# Altium PCB PCB1.PcbDoc
Units mil, origin at the board's own origin, x right, y up, seen from the top; angles counter-clockwise.
Board outline 3937.01 x 5905.51 mil, 2 copper layers (Top Layer, Bottom Layer); 149 components, 103 nets, 457 pads, 0 vias.
Unrouted connection lines stored in the file: 331.
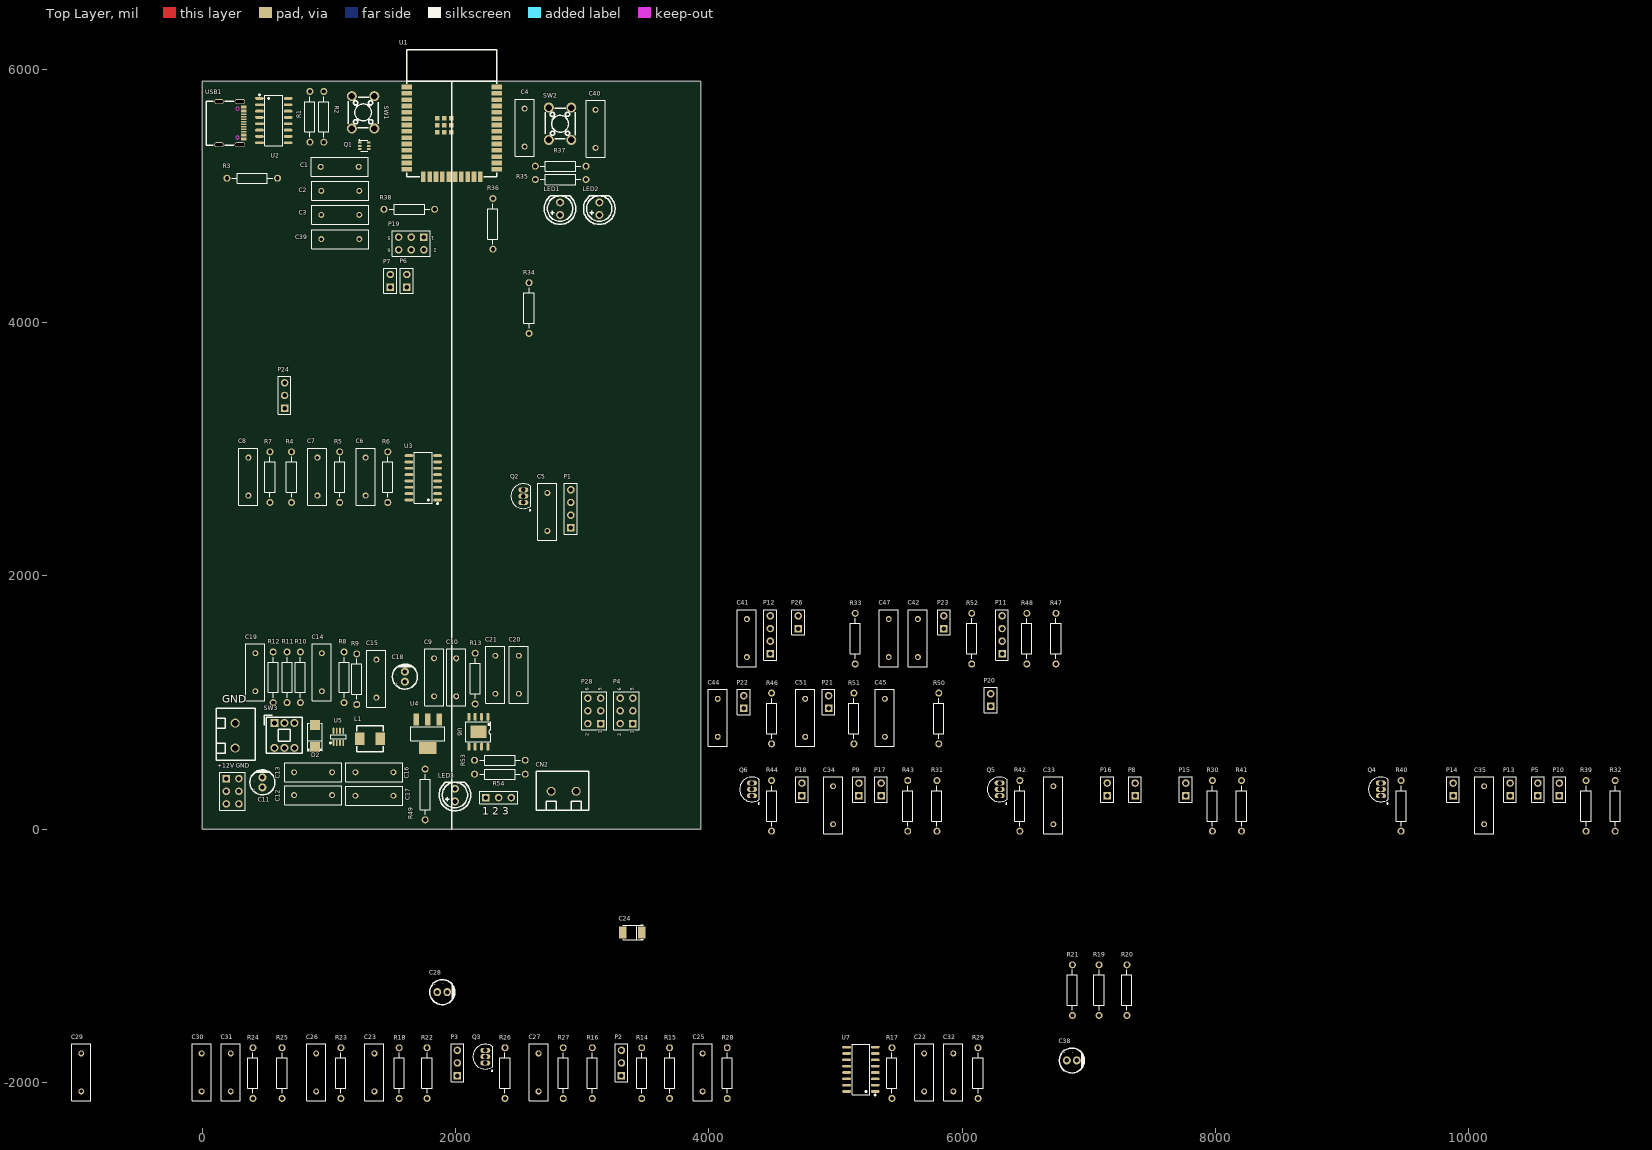
[diagram p0: Top Layer view]
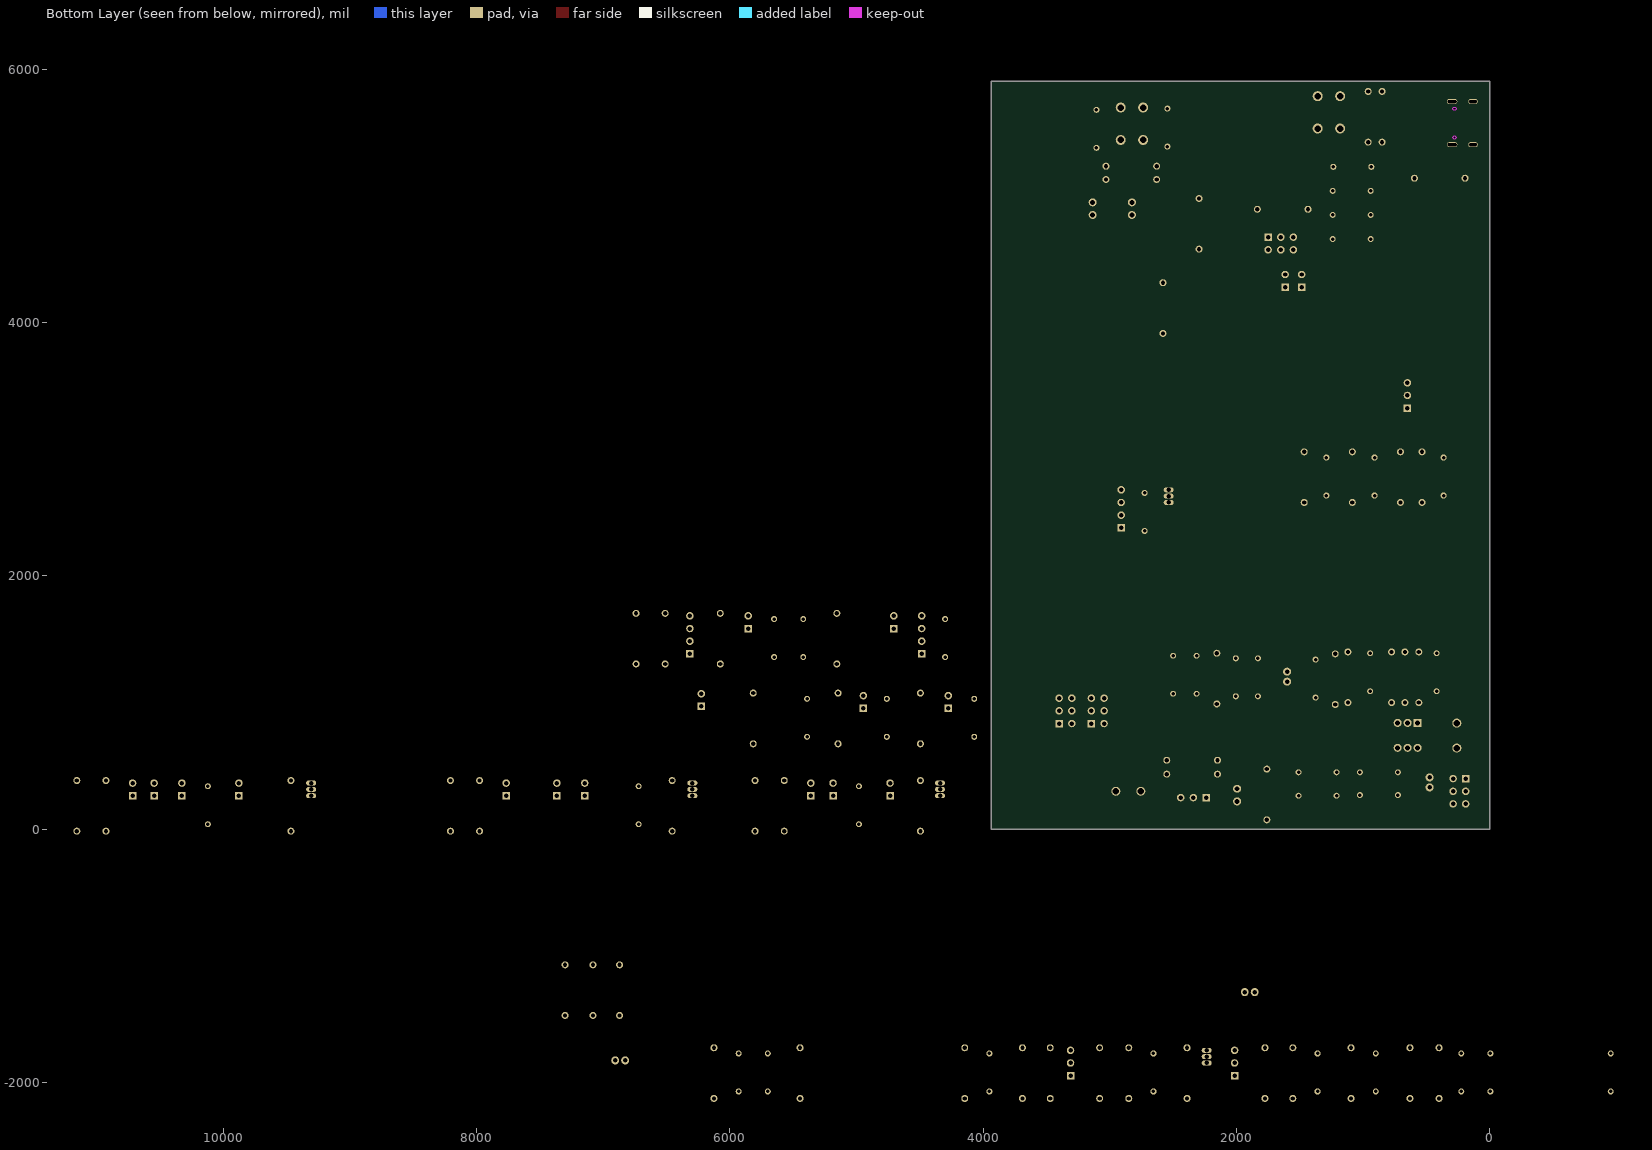
[diagram p1: Bottom Layer view, seen from below]

## Layer stack, top to bottom
Top Solder: solder mask 0.4, Solder Resist, Dk 3.5
Top Layer: signal copper 1.4
Dielectric 1: dielectric 12.6, FR-4, Dk 4.8
Bottom Layer: signal copper 1.4
Bottom Solder: solder mask 0.4, Solder Resist, Dk 3.5

## Board outline
0,0 3937.01,0 3937.01,5905.51 0,5905.51

## Design rules (kind name [scope] priority, off if disabled: settings)
Clearance Clearance_1 [All] p1: gap=10 ignorepadtopadclearanceinfootprint=FALSE except(0: Arc-Hole Track-Hole SMDPad-Hole THPad-Hole Via-Hole Fill-Hole Poly-Hole Region-Hole Text-Hole)
Clearance [All] p2: gap=10 ignorepadtopadclearanceinfootprint=FALSE except(0: Arc-Hole Track-Hole SMDPad-Hole THPad-Hole Via-Hole Fill-Hole Poly-Hole Region-Hole Text-Hole)
PolygonConnect [All] p1: connectstyle=Relief reliefconductorwidth=10 reliefentries=4 polygonreliefangle="90 Angle" airgapwidth=10
RoomDefinition Sensor [InComponentClass('Sensor')] p1 off: confinementstyle=ConfineIn formatcopy=TRUE lockcomponents=FALSE outline -1040,-2305 9890,-2305 9890,-1585 -1040,-1585
RoomDefinition IO [InComponentClass('IO')] p2 off: confinementstyle=ConfineIn formatcopy=TRUE lockcomponents=FALSE outline 4230,-55 11300,-55 11300,525 4230,525
RoutingVias [All] p1: holewidth=28 width=50 viastyle="Through Hole" minholewidth=28 minwidth=50 maxholewidth=28 maxwidth=50
SolderMaskExpansion [All] p1: expansion=4 istentingtop=FALSE
Width [All] p1: maxlimit=10 minlimit=10 preferedwidth=10
30 further rules are at their usual default settings.

## Classes and differential pairs
component class IO2: C41 C42 C47 P11 P12 P23 P26 R33 R34 R47 R48 R52
component class Sensor: C5 C6 C7 C8 C22 C23 C24 C25 C26 C27 C28 C29 C30 C31 C32 C38 P1 P2 P3 P24 Q2 Q3 R4 R5 R6 R7 R14 R15 R16 R17 R18 R19 R20 R21 R22 R23 R24 R25 R26 R27 R28 R29 U3 U7
component class Power: +12V C9 C10 C11 C12 C13 C14 C15 C16 C17 C18 C19 C20 C21 CN2 D2 GND L1 LED2 LED3 P4 P28 R8 R9 R10 R11 R12 R13 R36 R49 R53 R54 SW3 U4 U5 U6
component class IO: C33 C34 C35 C44 C45 C51 P5 P6 P7 P8 P9 P10 P13 P14 P15 P16 P17 P18 P20 P21 P22 Q4 Q5 Q6 R30 R31 R32 R39 R40 R41 R42 R43 R44 R46 R50 R51
component class Core: C1 C2 C3 C4 C39 C40 C? LED1 P19 Q1 R1 R2 R3 R35 R37 R38 SW1 SW2 U1 U2 USB1

## Components (designator, comment, footprint, x,y, rotation, side; value= is the part's Value field where it differs from the comment)
"1 2 3" "TestCurrent" HDR1X3 2240,250 r0 top (schematic designator P25)
+12V "MX126-5.0-02P-GN01-Cu-S-A" CONN-TH_2P-P5.00_MX126-5.0-GN01-02P-CU-S-A 260,740 r270 top (schematic designator CN1)
C1 "Cap" RAD-0.3 1085,5230 r0 top value=100nF
C2 "Cap" RAD-0.3 1090,5040 r0 top value=10uF
C3 "Cap" RAD-0.3 1090,4850 r0 top value=100nF
C4 "Cap" RAD-0.3 2545,5540 r270 top value=100nF
C5 "Cap" RAD-0.3 2725,2505 r90 top value=10uF
C6 "Cap" RAD-0.3 1290,2785 r90 top value=10uF
C7 "Cap" RAD-0.3 910,2785 r90 top value=100nF
C8 "Cap" RAD-0.3 365,2785 r90 top value=100nF
C9 "Cap" RAD-0.3 1830,1200 r270 top value=10uF
C10 "Cap" RAD-0.3 2005,1200 r270 top value=100uF
C11 "47uF" CAP-TH_BD5.0-P2.00-D0.5-FD-A 475,370 r90 top
C12 "Cap" RAD-0.3 875,270 r180 top value=22uF
C13 "Cap" RAD-0.3 875,450 r180 top value=100nF
C14 "Cap" RAD-0.3 945,1240 r270 top value=100nF
C15 "Cap" RAD-0.3 1375,1190 r90 top value=100uF
C16 "Cap" RAD-0.3 1360,450 r0 top value=22uF
C17 "Cap" RAD-0.3 1360,265 r0 top value=22uF
C18 "47uF" CAP-TH_BD5.0-P2.00-D0.5-FD-A 1600,1205 r90 top
C19 "Cap" RAD-0.3 420,1240 r270 top value=33pF
C20 "Cap" RAD-0.3 2500,1220 r90 top value=100nF
C21 "Cap" RAD-0.3 2315,1220 r90 top value=47uF
C22 "Cap" RAD-0.3 5700,-1920 r90 top value=10nF
C23 "Cap" RAD-0.3 1360,-1920 r90 top value=5nF
C24 "22uF" CASE-B_3528 3395,-815 r180 top
C25 "Cap" RAD-0.3 3950,-1920 r90 top value=100nF
C26 "Cap" RAD-0.3 900,-1920 r90 top value=10nF
C27 "Cap" RAD-0.3 2655,-1920 r90 top value=10nF
C28 "47uF" CAP-TH_BD5.0-P2.00-D0.5-FD-A 1895,-1285 r0 top
C29 "Cap" RAD-0.3 -955,-1920 r90 top value=10nF
C30 "Cap" RAD-0.3 -5,-1920 r90 top value=10nF
C31 "Cap" RAD-0.3 225,-1920 r90 top value=100nF
C32 "Cap" RAD-0.3 5930,-1920 r90 top value=10nF
C33 "Cap" RAD-0.3 6720,190 r90 top value=100nF
C34 "Cap" RAD-0.3 4980,190 r90 top value=100nF
C35 "Cap" RAD-0.3 10120,190 r90 top value=100nF
C38 "47uF" CAP-TH_BD5.0-P2.00-D0.5-FD-A 6865,-1825 r0 top
C39 "Cap" RAD-0.3 1090,4660 r180 top value=100nF
C40 "Cap" RAD-0.3 3105,5530 r270 top value=100nF
C41 "Cap" RAD-0.3 4300,1510 r90 top value=100nF
C42 "Cap" RAD-0.3 5650,1510 r90 top value=100nF
C44 "Cap" RAD-0.3 4070,880 r90 top value=100nF
C45 "Cap" RAD-0.3 5390,880 r90 top value=100nF
C47 "Cap" RAD-0.3 5420,1510 r90 top value=100nF
C51 "Cap" RAD-0.3 4760,880 r90 top value=100nF
CN2 "MX126-5.0-02P-GN01-Cu-S-A" CONN-TH_2P-P5.00_MX126-5.0-GN01-02P-CU-S-A 2853.43,300 r0 top
D2 "SMAJ12A" SMA_L4.3-W2.6-LS5.2-RD 890,735 r90 top
GND "12V" HDR2X3 190,400 r270 top (schematic designator P27)
L1 "4.7uH" IND-SMD_L5.4-W5.2_FXL0530 1324.29,715 r0 top
LED1 "HL-503S45FC" LED-TH_BD5.0-P2.54-FD 2825,4900 r90 top
LED2 "HL-503S45FC" LED-TH_BD5.0-P2.54-FD 3135,4900 r90 top
LED3 "HL-503S45FC" LED-TH_BD5.0-P2.54-FD 1995,270 r90 top
P1 "Header 4" HDR1X4 2910,2380 r90 top
P2 "Header 3" HDR1X3 3310,-1945 r90 top
P3 "Header 3" HDR1X3 2015,-1945 r90 top
P4 "5V" HDR2X3 3400,835 r90 top
P5 "LIght connect" HDR1X2 10545,265 r90 top
P6 "motor_in1" HDR1X2 1615,4280 r90 top
P7 "motor_in2" HDR1X2 1485,4280 r90 top
P8 "Limit_switch1" HDR1X2 7365,265 r90 top
P9 "Limit_switch2" HDR1X2 5185,265 r90 top
P10 "switch1" HDR1X2 10715,265 r90 top
P11 "optocoupler1" HDR1X4 6315,1385 r90 top
P12 "optocoupler1" HDR1X4 4485,1385 r90 top
P13 "Lamp1" HDR1X2 10325,265 r90 top
P14 "Lamp1_io" HDR1X2 9875,265 r90 top
P15 "Lamp2" HDR1X2 7765,265 r90 top
P16 "Lamp2_io" HDR1X2 7145,265 r90 top
P17 "Lamp3" HDR1X2 5360,265 r90 top
P18 "Lamp3_io" HDR1X2 4735,265 r90 top
P19 "JTAG" HDR2X3 1750,4675 r180 top
P20 "switch2" HDR1X2 6225,970 r90 top
P21 "switch3" HDR1X2 4945,955 r90 top
P22 "switch4" HDR1X2 4275,955 r90 top
P23 "switch5" HDR1X2 5855,1585 r90 top
P24 "SwitchHx711Power" HDR1X3 650,3325 r90 top
P26 "IO36" HDR1X2 4705,1585 r90 top
P28 "3V3" HDR2X3 3145,835 r90 top
Q1 "UMH3NTN" SOT-363_L2.0-W1.3-P0.65-LS2.1-TL 1280,5395 r0 top
Q2 "S8550" TO-92A 2535,2630 r0 top
Q3 "9013" TO-92A 2235,-1795 r0 top
Q4 "9013" TO-92A 9305,315 r0 top
Q5 "9013" TO-92A 6295,315 r0 top
Q6 "9013" TO-92A 4340,315 r0 top
R1 "Res2" AXIAL-0.4 850,5625 r270 top value=470
R2 "Res2" AXIAL-0.4 960,5625 r270 top value=470
R3 "Res2" AXIAL-0.4 395,5140 r180 top value=10K
R4 "Res2" AXIAL-0.4 705,2780 r90 top value=1k
R5 "Res2" AXIAL-0.4 1085,2780 r90 top value=1k
R6 "Res2" AXIAL-0.4 1465,2780 r90 top value=20K
R7 "Res2" AXIAL-0.4 535,2780 r90 top value=8.2K
R8 "Res2" AXIAL-0.4 1120,1200 r90 top value=100K
R9 "Res2" AXIAL-0.4 1220,1185 r90 top value=10R
R10 "Res2" AXIAL-0.4 775,1200 r90 top value=20K
R11 "Res2" AXIAL-0.4 670,1200 r90 top value=7.5K
R12 "Res2" AXIAL-0.4 560,1200 r270 top value=40.2K
R13 "Res2" AXIAL-0.4 2155,1190 r90 top value=30K
R14 "Res2" AXIAL-0.4 3470,-1925 r90 top value=6.8K
R15 "Res2" AXIAL-0.4 3690,-1925 r90 top value=1.5M
R16 "Res2" AXIAL-0.4 3080,-1925 r90 top value=18K
R17 "Res2" AXIAL-0.4 5445,-1925 r90 top value=2K
R18 "Res2" AXIAL-0.4 1555,-1925 r90 top value=1M
R19 "Res2" AXIAL-0.4 7080,-1270 r90 top value=18K
R20 "Res2" AXIAL-0.4 7300,-1270 r90 top value=10K
R21 "Res2" AXIAL-0.4 6870,-1270 r90 top value=1M
R22 "Res2" AXIAL-0.4 1775,-1925 r90 top value=18K
R23 "Res2" AXIAL-0.4 1095,-1925 r90 top value=47K
R24 "Res2" AXIAL-0.4 400,-1925 r90 top value=1M
R25 "Res2" AXIAL-0.4 630,-1925 r90 top value=1M
R26 "Res2" AXIAL-0.4 2390,-1925 r90 top value=1M
R27 "Res2" AXIAL-0.4 2850,-1925 r90 top value=1M
R28 "Res2" AXIAL-0.4 4145,-1925 r90 top value=1M
R29 "Res2" AXIAL-0.4 6125,-1925 r90 top value=10K
R30 "Res2" AXIAL-0.4 7975,185 r90 top value=10K
R31 "Res2" AXIAL-0.4 5800,185 r90 top value=10K
R32 "Res2" AXIAL-0.4 11155,185 r90 top value=10K
R33 "Res2" AXIAL-0.4 5155,1505 r90 top value=10K
R34 "Res2" AXIAL-0.4 2580,4115 r90 top value=5.1K
R35 "Res2" AXIAL-0.4 2830,5130 r0 top value=1K
R36 "Res2" AXIAL-0.4 2295,4780 r270 top value=1K
R37 "Res2" AXIAL-0.4 2830,5235 r180 top value=10K
R38 "Res2" AXIAL-0.4 1635,4895 r0 top value=10K
R39 "Res2" AXIAL-0.4 10925,185 r90 top value=3.3K
R40 "Res2" AXIAL-0.4 9465,185 r90 top value=10K
R41 "Res2" AXIAL-0.4 8205,185 r90 top value=3.3K
R42 "Res2" AXIAL-0.4 6455,185 r90 top value=10K
R43 "Res2" AXIAL-0.4 5570,185 r90 top value=3.3K
R44 "Res2" AXIAL-0.4 4495,185 r90 top value=10K
R46 "Res2" AXIAL-0.4 4495,875 r90 top value=10K
R47 "Res2" AXIAL-0.4 6740,1505 r90 top value=10K
R48 "Res2" AXIAL-0.4 6510,1505 r90 top value=5.1K
R49 "Res2" AXIAL-0.4 1760,275 r270 top value=3.3K
R50 "Res2" AXIAL-0.4 5815,875 r90 top value=10K
R51 "Res2" AXIAL-0.4 5145,875 r90 top value=10K
R52 "Res2" AXIAL-0.4 6075,1505 r90 top value=10K
R53 "Res2" AXIAL-0.4 2350,545 r180 top value=0
R54 "Res2" AXIAL-0.4 2350,435 r0 top value=0
SW1 "K2-1102DP-C4SW-04" KEY-TH_4P-L6.0-W6.0-P4.50-LS6.50 1270,5660 r270 top
SW2 "K2-1102DP-C4SW-04" KEY-TH_4P-L6.0-W6.0-P4.50-LS6.50 2825,5570 r90 top
SW3 "XKB7070-Z" SW-TH_6P-L7.0-W7.0-P2.00 648.74,741.59 r90 top
U1 "ESP32-WROOM-32E-N4" WIFI-SMD_ESP32-WROOM-32E 1970.66,5505.57 r270 top
U2 "CH343G" SOP-16_L10.0-W3.9-P1.27-LS6.0-BL 565,5595 r270 top
U3 "HX711" SOP-16_L10.0-W3.9-P1.27-LS6.0-BL 1745,2775 r90 top
U4 "LM1117IMPX-3.3/NOPB" SOT-223_L6.5-W3.5-P2.30-LS7.0-BR 1780,755 r90 top
U5 "MP2315GJ-Z" TSOT-23-8_L2.9-W1.6-P0.65-LS2.8-BR 1075,730 r270 top
U6 "DRV8871DDA" POWERPAD-SO-8_L4.9-W3.9-P1.27-LS6.0-BL-EP 2180,770 r180 top
U7 "BISS0001" SOP-16_L10.0-W3.9-P1.27-LS6.0-BL 5200,-1895 r90 top
USB1 "TYPEC-304J-BCP16" USB-C-SMD_TYPEC-304J-BCP16 230,5575 r270 top

## Footprints (in the part's own frame and the unit in brackets; to place one, negate y for a bottom-side part, rotate by r counter-clockwise, add the part's x,y. Pads: shape width x height; smd on the part's side, far side on the other; paste and mask are expansions set on the pad)
AXIAL-0.4 [mm] "Axial Device, Thru-Hole; 2 Leads; 0.4 in Pin Spacing"
  round 1.4 hole 0.85: 1(-5.08,0) 2(5.08,0)
  silkscreen extent -4.06,-1.02 4.06,1.02
CAP-TH_BD5.0-P2.00-D0.5-FD-A [mm]
  round 1.6 hole 0.9 paste+0 mask+0.05: 1(-1,0) 2(1,0)
  silkscreen extent -2.49,-2.52 2.6,2.49
CASE-B_3528 [mil]
  rect 59.3x93.54 smd: 1(-73.25,0) 2(73.25,0)
  silkscreen extent -87,-61 72,61
CONN-TH_2P-P5.00_MX126-5.0-GN01-02P-CU-S-A [mm]
  round 1.8 hole 1.3 paste+0 mask+0.05: 1(-2.5,0) 2(2.5,0)
  silkscreen extent -5.5,-3.8 5,4
HDR1X2 [mm] "Connector; Header; 2 Position"
  rect 1.5x1.5 hole 0.9: 1(0,0)
  round 1.5 hole 0.9: 2(2.54,0)
  silkscreen extent -1.27,-1.27 3.81,1.27
HDR1X3 [mm] "Connector; Header; 3 Position"
  rect 1.5x1.5 hole 0.9: 1(0,0)
  round 1.5 hole 0.9: 2(2.54,0) 3(5.08,0)
  silkscreen extent -1.27,-1.27 6.35,1.27
HDR1X4 [mm] "Connector; Header; 4 Position"
  rect 1.5x1.5 hole 0.9: 1(0,0)
  round 1.5 hole 0.9: 2(2.54,0) 3(5.08,0) 4(7.62,0)
  silkscreen extent -1.27,-1.27 8.89,1.27
HDR2X3 [mm] "Connector; Header; 3x2 Position"
  rect 1.5x1.5 hole 0.9: 1(0,0)
  round 1.5 hole 0.9: 2(0,2.54) 3(2.54,0) 4(2.54,2.54) 5(5.08,0) 6(5.08,2.54)
  silkscreen extent -1.27,-1.27 6.35,3.81
IND-SMD_L5.4-W5.2_FXL0530 [mm]
  rect 1.9x2.5 smd: 1(-2.05,0) 2(2.05,0)
  silkscreen extent -2.7,-2.6 2.7,2.6
KEY-TH_4P-L6.0-W6.0-P4.50-LS6.50 [mm]
  round 2 hole 1.3: 1(-3.25,2.25) 2(3.25,2.25) 3(-3.25,-2.25) 4(3.25,-2.25)
  silkscreen extent -3,-3 3.1,3
LED-TH_BD5.0-P2.54-FD [mm]
  round 1.6 hole 1: 1(-1.27,0) 2(1.27,0)
  silkscreen extent -3.17,-3.17 2.54,3.17
POWERPAD-SO-8_L4.9-W3.9-P1.27-LS6.0-BL-EP [mm]
  oval 0.6x1.6 smd: 1(-1.905,-3) 2(-0.635,-3) 3(0.635,-3) 4(1.905,-3) 5(1.905,3) 6(0.635,3) 7(-0.635,3) 8(-1.905,3)
  rect 3.2x2.5 smd: 9(0,0)
  silkscreen extent -2.5,-2 2.5,2
RAD-0.3 [mm] "Radial Cap, Thru-Hole; 2 Leads; 0.3 in Pin Spacing"
  round 1.2 hole 0.7: 1(-3.81,0) 2(3.81,0)
  silkscreen extent -5.71,-1.91 5.71,1.91
SMA_L4.3-W2.6-LS5.2-RD [mm]
  rect 2x2 smd: 1(-2.2,0) 2(2.2,0)
  silkscreen extent -2.98,-1.5 2.6,1.5
SOP-16_L10.0-W3.9-P1.27-LS6.0-BL [mm]
  oval 0.56x1.745 smd: 1(-4.445,-2.872) 2(-3.175,-2.872) 3(-1.905,-2.872) 4(-0.635,-2.872) 5(0.635,-2.872) 6(1.905,-2.872) 7(3.175,-2.872) 8(4.445,-2.872) 9(4.445,2.872) 10(3.175,2.872) 11(1.905,2.872) 12(0.635,2.872) 13(-0.635,2.872) 14(-1.905,2.872) 15(-3.175,2.872) 16(-4.445,2.872)
  silkscreen extent -5.33,-3.02 5.08,1.77
SOT-223_L6.5-W3.5-P2.30-LS7.0-BR [mm]
  rect 2.465x1.05 smd: 1(2.857,-2.3) 2(2.857,0) 3(2.857,2.3)
  rect 2.465x3.54 smd: 4(-2.857,0)
  silkscreen extent -1.4,-3.4 1.4,3.4
SOT-363_L2.0-W1.3-P0.65-LS2.1-TL [mm]
  rect 0.7x0.42 smd: 1(-0.92,0.65) 2(-0.92,0) 3(-0.92,-0.65) 4(0.92,-0.65) 5(0.92,0) 6(0.92,0.65)
  silkscreen extent -1.09,-1.1 0.7,1.24
SW-TH_6P-L7.0-W7.0-P2.00 [mm]
  rect 1.6x1.6 hole 1: 1(2.5,2)
  round 1.6 hole 1: 2(2.5,0) 3(2.5,-2) 4(-2.5,2) 5(-2.5,0) 6(-2.5,-2)
  silkscreen extent -3.6,-3.6 4.06,4.06
TO-92A [mm] "TO, Flat Index; 3 In-Line, Axial Leads; Body Dia. 4.5mm; Leads 0.51 x 0.48 mm (max)"
  oval 2x1 hole 0.9: 1(0,-1.27) 2(0,0) 3(0,1.27)
  silkscreen extent -2.48,-2.95 1.5,2.48, body extent -2.48,-2.5 1.5,2.5, height 6.86
TSOT-23-8_L2.9-W1.6-P0.65-LS2.8-BR [mil]
  oval 48.11x14.33 smd: 1(47.68,-38.39) 2(47.68,-12.8) 3(47.68,12.79) 4(47.68,38.39) 5(-47.68,38.39) 6(-47.68,12.79) 7(-47.68,-12.8) 8(-47.68,-38.39)
  silkscreen extent -15,-69 54,60
USB-C-SMD_TYPEC-304J-BCP16 [mm]
  oval 1x2.1 hole 0.6 slot 1.8 at 90 deg: 13(-4.325,1.719) 14(4.325,1.719)
  oval 1x1.9 hole 0.6 slot 1.5 at 90 deg: 15(-4.325,-2.481) 16(4.325,-2.481)
  rect 0.6x1.15 smd paste-100 mask+0.051: A1B12(-3.2,2.481) A4B9(-2.4,2.481) B1A12(3.2,2.481) B4A9(2.4,2.481)
  rect 0.3x1.15 smd paste-100 mask+0.051: A5(-1.25,2.481) A6(-0.25,2.481) A7(0.25,2.481) A8(1.25,2.481) B5(1.75,2.481) B6(0.75,2.481) B7(-0.75,2.481) B8(-1.75,2.481)
  Keep-Out Layer board cut-out: -2.565,1.219 -2.566,1.283 -2.616,1.401 -2.707,1.491 -2.826,1.54 -2.954,1.54 -3.073,1.491 -3.164,1.401 -3.214,1.283 -3.215,1.219 -3.215,1.219 -3.214,1.155 -3.164,1.037 -3.073,0.947 -2.954,0.898 -2.826,0.898 -2.707,0.946 -2.616,1.037 -2.566,1.155 -2.565,1.219 -2.565,1.219
  Keep-Out Layer board cut-out: 3.215,1.219 3.214,1.283 3.164,1.401 3.073,1.491 2.954,1.54 2.826,1.54 2.707,1.491 2.616,1.401 2.566,1.283 2.565,1.219 2.565,1.219 2.566,1.155 2.616,1.037 2.707,0.947 2.826,0.898 2.954,0.898 3.073,0.946 3.164,1.037 3.214,1.155 3.215,1.219 3.215,1.219
  silkscreen extent -4.4,-5.08 4.4,0.44
WIFI-SMD_ESP32-WROOM-32E [mm]
  rect 0.95x2.1 smd: 1(-9.003,-9) 2(-7.733,-9) 3(-6.463,-9) 4(-5.193,-9) 5(-3.923,-9) 6(-2.653,-9) 7(-1.383,-9) 8(-0.113,-9) 9(1.157,-9) 10(2.427,-9) 11(3.697,-9) 12(4.967,-9) 13(6.237,-9) 14(7.507,-9) 25(7.507,9) 26(6.237,9) 27(4.967,9) 28(3.697,9) 29(2.427,9) 30(1.157,9) 31(-0.113,9) 32(-1.383,9) 33(-2.653,9) 34(-3.923,9) 35(-5.193,9) 36(-6.463,9) 37(-7.733,9) 38(-9.003,9)
  rect 2.1x0.95 smd: 15(9.003,-5.715) 16(9.003,-4.445) 17(9.003,-3.175) 18(9.003,-1.905) 19(9.003,-0.635) 20(9.003,0.635) 21(9.003,1.905) 22(9.003,3.175) 23(9.003,4.445) 24(9.003,5.715)
  rect 0.9x0.9 smd: 39(-2.722,-0.1) 39(-2.722,-2.9) 39(-2.722,-1.5) 39(-1.322,-0.1) 39(-1.322,-1.5) 39(-1.322,-2.9) 39(0.078,-0.1) 39(0.078,-1.5) 39(0.078,-2.9)
  silkscreen extent -16.48,-9 9.02,9.02

## Part data
"1 2 3" P24: library part "Header 3", "Header, 3-Pin", LatestRevisionDate=17-Jul-2002, LatestRevisionNote="Re-released for DXP Platform.", Publisher="Altium Limited"
+12V CN2: Color=绿色, Current Rating (Max)=10A, JLCPCB Part Class=扩展库, LCSC Part Name="5mm 1x2P 排数:1 每排P数:2 直插", Manufacturer=MAX(迈旭), Operating Temperature Range=-40℃~+105℃, Voltage Rating (Max)=300V, Add into BOM=yes, Contact Material=铜合金, Contact Plating=锡, Convert to PCB=yes, Datasheet=https://atta.szlcsc.com/upload/public/pdf/source/20230914/2B012B5258BE925E2417FA81B30CB923.pdf, Device=MX126-5.0-02P-GN01-Cu-S-A, Manufacturer Part=MX126-5.0-02P-GN01-Cu-S-A, Mounting Style=直插, Number of Pins=2P, Number of PINs Per Row=2, Number of Rows=1, Pitch=5mm, Structure=1x2P, Supplier=LCSC, Supplier Footprint=插件,P=5mm, Supplier Part=C5188434, Symbol=MX126-5.0-GN01-02P-CU-S-A, Wire Gauge - AWG=14~26, Wire Gauge - mm2=2.5
  +12V: MX126-5.0-02P-GN01-Cu-S-A=PowerInput
  CN2: MX126-5.0-02P-GN01-Cu-S-A=motorOutput
C1 C2 C3 C4 C5 C6 C7 C8 C9 C10 C12 C13 C14 C15 C16 C17 C19 C20 C21 C22 C23 C25 C26 C27 C29 C30 C31 C32 C33 C34 C35 C39 C40 C41 C42 C44 C45 C47 C51: "Capacitor", LatestRevisionDate=17-Jul-2002, LatestRevisionNote="Re-released for DXP Platform.", PackageDescription="Radial Cap, Thru-Hole; 2 Leads; 0.3 in Pin Spacing", PackageReference=RAD-0.3, Published=8-Jun-2000, Publisher="Altium Limited"
C11 C18 C28 C38: library part 01EC1119, Equivalent Series Resistance(ESR)=1Ω@100kHz, JLCPCB Part Class=扩展库, LCSC Part Name="47uF ±20% 35V", Lifetime @ Temp=7000hrs@105℃, Manufacturer=KNSCHA(科尼盛), Operating Temperature=-55℃~+105℃, Rated Voltage=35V, Ripple Current=135mA@100kHz, Tolerance=±20%, Add into BOM=yes, Convert to PCB=yes, Datasheet=https://atta.szlcsc.com/upload/public/pdf/source/20210521/C2833295_D5EF56CA4AAF67B2F3976F630DF1C3A7.pdf, Device=01EC1119, L=11mm, Lead Spacing=2mm, Manufacturer Part=01EC1119, Name=47uF35V, Supplier=LCSC, Supplier Footprint=插件,D5xL11mm, Supplier Part=C2833295, Symbol=01EC1119, φD=5mm
C24: library part TAJB226K016RNJ, Equivalent Series Resistance(ESR)=2.3Ω@100kHz, JLCPCB Part Class=扩展库, LCSC Part Name="22uF ±10% 16V", Manufacturer="Kyocera AVX", Operating Temperature=-55℃~+125℃, Rated Voltage=16V, Tolerance=±10%, Add into BOM=yes, Convert to PCB=yes, Datasheet=https://atta.szlcsc.com/upload/public/pdf/source/20160107/1457707750344.pdf, Device=TAJB226K016RNJ, Manufacturer Part=TAJB226K016RNJ, Name=22uF16V, Supplier=LCSC, Supplier Footprint=CASE-B-3528, Supplier Part=C8020, Symbol=TAJB226K016RNJ
D2: library part SMAJ12A_C148213, Breakdown Voltage=13.3V, JLCPCB Part Class=扩展库, LCSC Part Name="单向TVS 12V截止", Manufacturer=Littelfuse(美国力特), Maximum Clamping Voltage=19.9V, Peak Pulse Current (Ipp)@10/1000us=20.1A, Peak Pulse Power Dissipation (Ppp)@10/1000us=400W, Reverse Stand-Off Voltage (Vrwm)=12V, Add into BOM=yes, Convert to PCB=yes, Datasheet=https://atta.szlcsc.com/upload/public/pdf/source/20190402/C374025_5ACE77BC72947DF13CF0CBC7F8B57228.pdf, Device=SMAJ12A_C148213, Manufacturer Part=SMAJ12A, Name=SMAJ12A, polarity=单向, Supplier=LCSC, Supplier Footprint=SMA(DO-214AC), Supplier Part=C148213, Symbol=SMAJ12A-C148213, Type=TVS
GND P4 P19 P28: library part "Header 3X2", "Header, 3-Pin, Dual row", LatestRevisionDate=17-Jul-2002, LatestRevisionNote="Re-released for DXP Platform.", Publisher="Altium Limited"
L1: library part FXL0530-4R7-M, DC Resistance (DCR)=60mΩ, JLCPCB Part Class=扩展库, LCSC Part Name="4.7uH ±20% 5A", Manufacturer=cjiang(长江微电), Rated Current=4.5A, Saturation Current (Isat)=5A, Tolerance=±20%, 4R7=4.7uH, Add into BOM=yes, Convert to PCB=yes, Datasheet=https://atta.szlcsc.com/upload/public/pdf/source/20240426/3189EA8206330E2108542F9E34E540E7.pdf, Device=FXL0530-4R7-M, Manufacturer Part=FXL0530-4R7-M, Supplier=LCSC, Supplier Footprint=SMD,5.2x5.4mm, Supplier Part=C177246, Symbol=FXL0530-4R7-M, Type=一体成型电感
LED1 LED2 LED3: Color Temperature=-, Emitted Color=红色, Forward Current=20mA, Forward Voltage (VF)=2.2V, JLCPCB Part Class=扩展库, Lens Color=无色透明透镜, Manufacturer=HONGLITRONIC(鸿利光电), Operating Temperature=-30℃~+80℃, Power Dissipation=66mW, Add into BOM=yes, Convert to PCB=yes, Datasheet=https://atta.szlcsc.com/upload/public/pdf/source/20200630/C568942_DE1B88CAD7C81208DB145E6C2FD02F7C.pdf, Device=HL-503S45FC, Diode Configuration=-, Dominant Wavelength=617nm~627nm, Lamp Holder Type=5mm圆形灯头, LCSC Part Name=HL-503S45FC, Luminous Intensity=10750mcd, Manufacturer Part=HL-503S45FC, Mounting Sytle=-, Name=LED, Peak Wavelength=-, Supplier=LCSC, Supplier Footprint=插件,D=5mm, Supplier Part=C568942, Symbol=HL-503S45FC, Viewing Angle=15°
P1: "Header, 4-Pin", LatestRevisionDate=17-Jul-2002, LatestRevisionNote="Re-released for DXP Platform.", Publisher="Altium Limited"
P2 P3: "Header, 3-Pin", LatestRevisionDate=17-Jul-2002, LatestRevisionNote="Re-released for DXP Platform.", Publisher="Altium Limited"
P5 P6 P7 P8 P9 P10 P13 P14 P15 P16 P17 P18 P20 P21 P22 P23 P26: library part "Header 2", "Header, 2-Pin", LatestRevisionDate=17-Jul-2002, LatestRevisionNote="Re-released for DXP Platform.", Publisher="Altium Limited"
P11 P12: library part "Header 4", "Header, 4-Pin", LatestRevisionDate=17-Jul-2002, LatestRevisionNote="Re-released for DXP Platform.", Publisher="Altium Limited"
Q1: Collector Current (Ic)=100mA, Collector-Emitter Breakdown Voltage (Vceo)=50V, DC Current Gain (hFE@Ic,Vce)=100@1mA,5V, JLCPCB Part Class=扩展库, LCSC Part Name="耐压:50V 电流:100mA", Manufacturer=ROHM(罗姆), Power Dissipation (Pd)=150mW, Add into BOM=yes, Convert to PCB=yes, Datasheet=https://atta.szlcsc.com/upload/public/pdf/source/20170726/C123008_1501054486996843958.pdf, Device=UMH3NTN, Manufacturer Part=UMH3NTN, Name=UMH3NTN, Supplier=LCSC, Supplier Footprint=SOT-363, Supplier Part=C123008, Symbol=UMH3NTN, Transistor Type=-
Q2: library part 2N3906, "PNP General Purpose Amplifier", ComponentLink1Description="Manufacturer Link", ComponentLink1URL=http://www.fairchildsemi.com/, ComponentLink2Description=Datasheet, ComponentLink2URL=http://www.fairchildsemi.com/ds/2N%2F2N3906.pdf, DatasheetVersion=1997, LatestRevisionDate=15-Jan-2003, LatestRevisionNote="PCB Footprint 'BCY-W3/D4.7' replaced", PackageDescription="TO, Flat Index; 3 In-Line, Axial Leads; Body Dia. 4.5mm; Leads 0.51 x 0.48 mm (max)", PackageReference=TO-92A, PackageVersion=Sep-1998, Published=8-Jun-2000, Publisher="Altium Limited"
Q3 Q4 Q5 Q6: library part 2N3904, "NPN General Purpose Amplifier", ComponentLink1Description="Manufacturer Link", ComponentLink1URL=http://www.fairchildsemi.com/, ComponentLink2Description=Datasheet, ComponentLink2URL=http://www.fairchildsemi.com/ds/2N%2F2N3904.pdf, DatasheetVersion=1997, LatestRevisionDate=15-Jan-2003, LatestRevisionNote="PCB Footprint 'BCY-W3/D4.7' replaced", PackageDescription="TO, Flat Index; 3 In-Line, Axial Leads; Body Dia. 4.5mm; Leads 0.51 x 0.48 mm (max)", PackageReference=TO-92A, PackageVersion=Sep-1998, Published=8-Jun-2000, Publisher="Altium Limited"
R1 R2 R3 R4 R5 R6 R7 R8 R9 R10 R11 R12 R13 R14 R15 R16 R17 R18 R19 R20 R21 R22 R23 R24 R25 R26 R27 R28 R29 R30 R31 R32 R33 R34 R35 R36 R37 R38 R39 R40 R41 R42 R43 R44 R46 R47 R48 R49 R50 R51 R52 R53 R54: "Resistor", LatestRevisionDate=17-Jul-2002, LatestRevisionNote="Re-released for DXP Platform.", PackageDescription="Axial Device, Thru-Hole; 2 Leads; 0.4 in Pin Spacing", PackageReference=AXIAL-0.4, Published=8-Jun-2000, Publisher="Altium Limited"
SW1 SW2: Contact Current=50mA, Insulation Resistance=100MΩ, JLCPCB Part Class=扩展库, LCSC Part Name=轻触按键开关6*6*5, Manufacturer=韩国韩荣, Operating Force=2.5N, Operating Temperature=-25℃~+85℃, Voltage Rating (DC)=12V, Actuator Style=圆形按钮, Add into BOM=yes, Circuit=单刀单掷, Convert to PCB=yes, Datasheet=https://atta.szlcsc.com/upload/public/pdf/source/20210810/D0CD9D77408EACA829A5E533AC6E5B1E.pdf, Device=K2-1102DP-C4SW-04, K2-1102DP-C4SW-04=K2-1102DP-C4SW-04, Manufacturer Part=K2-1102DP-C4SW-04, Mechanical Life=10万次, Mounting Style=直插, Supplier=LCSC, Supplier Footprint=插件, Supplier Part=C110153, Switch Height=5mm, Switch Length=6mm, Switch Width=6mm, Symbol=K2-1102DP-C4SW-04, With Lamp=-
SW3: Actuator/Cap Color=蓝色, Contact Current=100mA, Insulation Resistance=100MΩ, IP Rating=-, JLCPCB Part Class=扩展库, LCSC Part Name="按键开关   7*7插件自锁 蓝白黑", Manufacturer="XKB Connectivity(中国星坤)", Operating Force=160gf, Operating Temperature=-15℃~+55℃, Voltage Rating (AC)=250V, Voltage Rating (DC)=30V, Actuator Style=矩形按钮, Add into BOM=yes, Convert to PCB=yes, Datasheet=https://atta.szlcsc.com/upload/public/pdf/source/20211015/75A682A27A424BDE8D93C2CFA14C38FE.pdf, Device=XKB7070-Z, Manufacturer Part=XKB7070-Z, Mechanical Life=10万次, Mounting Style=直插, Pin Style=PC引脚, Self Lock / No Lock=自锁, Supplier=LCSC, Supplier Footprint=插件, Supplier Part=C318863, Symbol=XKB7070-Z, With Lamp=不带, XKB7070-Z=PowerButton
U1: JLCPCB Part Class=扩展库, LCSC Part Name="通用型Wi-Fi+BT+BLE MCU模组", Manufacturer=ESPRESSIF(乐鑫), Add into BOM=yes, Convert to PCB=yes, Datasheet=https://atta.szlcsc.com/upload/public/pdf/source/20220601/0020821B65DE5740BBACA5FACC5CF3B6.pdf, Device=ESP32-WROOM-32E-N4, ESP32-WROOM-32E-N4=ESP32-WROOM-32E-N4, Manufacturer Part=ESP32-WROOM-32E-N4, Supplier=LCSC, Supplier Footprint=SMD,18x25.5mm, Supplier Part=C701341, Symbol=ESP32-WROOM-32E(4MB)
U2: JLCPCB Part Class=扩展库, Manufacturer=WCH(南京沁恒), Add into BOM=yes, Applications Function=-, Convert to PCB=yes, Datasheet=https://atta.szlcsc.com/upload/public/pdf/source/20211010/C2846043_7FA705E1F14A2906F6A2AFA45FA28209.pdf, Device=CH343G, LCSC Part Name=CH343G, Manufacturer Part=CH343G, Name=CH343G, Protocol=-, Supplier=LCSC, Supplier Footprint=SOP-16, Supplier Part=C2844153, Symbol=CH343G
U3: library part HX711_C6705483, JLCPCB Part Class=扩展库, Manufacturer=AVIA(海芯科技), Add into BOM=yes, Convert to PCB=yes, Device=HX711_C6705483, LCSC Part Name=HX711, Manufacturer Part=HX711, Name=HX711, Supplier=LCSC, Supplier Footprint=SOP-16, Supplier Part=C6705483, Symbol=HX711_C6705483
U4: Dropout Voltage=1.2V@(800mA), JLCPCB Part Class=扩展库, LCSC Part Name="输入20V 输出3.3V 800mA", Manufacturer=TI(德州仪器), MAX Output Current=800mA, Maximum Input Voltage=15V, Operating Temperature=-40℃~+125℃, Output Voltage=3.3V, Power Supply Rejection Ratio (PSRR)=75dB@(120Hz), standby current=5mA, Add into BOM=yes, Convert to PCB=yes, Datasheet=http://www.ti.com/cn/lit/gpn/lm1117, Device=LM1117IMPX-3.3/NOPB, Manufacturer Part=LM1117IMPX-3.3/NOPB, Name=LM1117IMPX-3.3/NOPB, Number of Outputs=1, Output Polarity=正极, Output Type=固定, Supplier=LCSC, Supplier Footprint=SOT-223, Supplier Part=C23984, Symbol=LM1117IMPX-3.3/NOPB
U5: Input Voltage=4.5V~24V, JLCPCB Part Class=扩展库, Manufacturer=MPS(芯源), Operating Temperature=-40℃~+125℃@(TJ), Output Current (Max)=3A, Output Voltage=800mV~22.8V, Switching Frequency=500kHz, Add into BOM=yes, Convert to PCB=yes, Datasheet=https://atta.szlcsc.com/upload/public/pdf/source/20240315/E986BDF075E08D3649664A84BD5F173B.pdf, Device=MP2315GJ-Z, Function=降压型, LCSC Part Name=MP2315GJ-Z, Manufacturer Part=MP2315GJ-Z, Name=MP2315GJ-Z, Number of Outputs=1, Output Type=可调, Supplier=LCSC, Supplier Footprint=TSOT-23-8, Supplier Part=C45889, Switch tube (built-in/external)=内置, Symbol=MP2315GJ-Z, Synchronous Rectification=是, Topology=降压式
U6: JLCPCB Part Class=扩展库, Manufacturer=TI(德州仪器), Add into BOM=yes, Convert to PCB=yes, Datasheet=https://www.ti.com/cn/lit/gpn/drv8871, Device=DRV8871DDA, LCSC Part Name=DRV8871DDA, Manufacturer Part=DRV8871DDA, Name=DRV8871DDA, Supplier=LCSC, Supplier Footprint=SO-8-EP, Supplier Part=C1556867, Symbol=DRV8871DDA
U7: JLCPCB Part Class=扩展库, LCSC Part Name=红外传感信号处理器, Manufacturer=UMW(友台半导体), Add into BOM=yes, Convert to PCB=yes, Datasheet=https://atta.szlcsc.com/upload/public/pdf/source/20231109/48CCA2F2187B39D45C76AC1FEDDCACA0.pdf, Device=BISS0001, Manufacturer Part=BISS0001, Name=BISS0001, Supplier=LCSC, Supplier Footprint=SOP-16, Supplier Part=C404323, Symbol=BISS0001_C404323
USB1: Current Rating - Power (Max)=5A, JLCPCB Part Class=扩展库, LCSC Part Name="Type-C 母 卧贴", Manufacturer=XUNPU(讯普), Operating Temperature Range=-40℃~+85℃, Soldering Temperature(Max)=260℃, Add into BOM=yes, Connector Type=Type-C, Convert to PCB=yes, Datasheet=https://atta.szlcsc.com/upload/public/pdf/source/20210528/C2835315_A76BD3CF9329D12B6041421AD23BFD66.pdf, Device=TYPEC-304J-BCP16, Gender=母, Manufacturer Part=TYPEC-304J-BCP16, Mounting Style=卧贴, Name=TYPEC-304J-BCP16, Number of Contacts=16P, Number of Ports=1, Standard="USB 3.1", Supplier=LCSC, Supplier Footprint=SMD, Supplier Part=C2835315, Symbol=TYPEC-304J-BCP16

## Nets (pads, with @x,y where several pads share a name; then routed paths per layer and width w, separated by ;. In a path a pad name is that pad's centre, name@x,y a point inside that pad or via, vN(x,y) a via of type N, cw(c..) or ccw(c..) an arc to the next point about the centre after c; other vN are vias at no path point)
+3V3: C4.2 C10.2 C32.1 P3.3 P19.1 P24.1 P28.1 P28.3 P28.5 R20.2 R21.1 R29.1 R30.1 R31.1 R32.1 R33.2 R34.2 R36.1 R37.2 R38.2 R39.1 R41.1 R43.1 R46.1 R47.1 R48.1 R50.1 R51.1 R52.1 U1.2 U3.16 U4.2 U7.8 U7.11
+5: C9.2 C16.2 C17.2 C18.1 C19.2 L1.2 P4.1 P4.3 P4.5 P24.3 R12.2 R49.1 U4.3
+12: "1 2 3.1" C11.1 C12.2 C13.2 D2.1 GND.1 GND.3 GND.5 R8.2 R53.2 SW3.5 U5.2
D+: U2.5 USB1.A6 USB1.B6
D-: U2.6 USB1.A7 USB1.B7
DTR: Q1.2 Q1.4 U2.10
E+: C6.2 P1.4 Q2.3 R6.1 U3.3
EN: C39.2 Q1.6 R38.1 SW1.1 U1.3
"ESP RXD0": R1.2 U1.34
"ESP TXD0": R2.2 U1.35
GND: C1.2 C2.2 C3.2 C4.1 C5.1 C6.1 C8.2 C9.1 C10.1 C11.2 C12.1 C13.1 C14.1 C16.1 C17.1 C18.2 C26.2 C28.2 C29.1 C30.2 C31.2 C32.2 C33.1 C34.1 C35.1 C38.2 C39.1 C40.1 C41.2 C42.2 C44.1 C45.1 C47.1 C51.1 D2.2 GND.2 GND.4 GND.6 LED1.2 LED2.2 LED3.2 P1.3 P2.1 P3.1 P4.2 P4.4 P4.6 P8.1 P9.1 P10.1 P11.1 P11.2 P12.1 P12.2 P19.2 P20.1 P21.1 P22.1 P23.1 P26.1 P28.2 P28.4 P28.6 Q3.1 Q4.1 Q5.1 Q6.1 R7.1 R11.1 R23.2 R24.2 R25.2 R54.1 SW1.4 SW2.4 SW3.2 U1.1 U1.15 U1.38 U1.39 U2.1 U3.5 U3.9 U3.10 U3.14 U3.15 U4.1 U4.4 U5.1 U5.4 U7.7 USB1.13 USB1.14 USB1.15 USB1.16 USB1.A1B12 USB1.B1A12
IO0: C40.2 Q1.3 R37.1 SW2.1 U1.25
LED1: R35.1 U1.24
motor_out1: CN2.2 U6.6
motor_out2: CN2.1 U6.8
MTCK: P19.3 U1.16
MTDI: P19.5 U1.14
MTDO: P19.6 U1.23
MTMS: P19.4 U1.13
NetC5_2: C5.2 P24.2 Q2.1 U3.1
NetC7_1: C7.1 R4.1 U3.8
NetC7_2: C7.2 R5.1 U3.7
NetC8_1: C8.1 U3.6
NetC15_1: C15.1 L1.1 U5.3
NetC15_2: C15.2 R9.2
NetC19_1: C19.1 R10.2 R11.2 R12.1
NetC20_1: "1 2 3.2" C20.1 C21.1 R53.1 U6.5
NetC20_2: "1 2 3.3" C20.2 C21.2 R13.2 R54.2 U6.1 U6.7 U6.9
NetC22_1: C22.1 R14.2 R15.1 U7.13
NetC22_2: C22.2 R15.2 U7.12
NetC23_1: C23.1 C27.1 R18.1 R22.1 U7.15
NetC23_2: C23.2 C29.2
NetC24_1: C24.1 C25.1 R17.1
NetC24_2: C24.2 C27.2 R18.2 U7.16
NetC25_2: C25.2 R14.1 R17.2
NetC26_1: C26.1 P2.2 R16.2 R23.1
NetC28_1: C28.1 R22.2
NetC30_1: C30.1 R27.2 U7.4
NetC31_1: C31.1 R28.2 U7.5
NetC33_2: C33.2 P8.2 R30.2 U1.26
NetC34_2: C34.2 P9.2 R31.2 U1.12
NetC35_2: C35.2 P10.2 R32.2 U1.36
NetC38_1: C38.1 R19.2 R20.1
NetC41_1: C41.1 P12.3 R33.1 U1.7
NetC42_1: C42.1 P11.3 R47.2 U1.6
NetC44_2: C44.2 P22.2 R46.2 U1.31
NetC45_2: C45.2 P20.2 R50.2 U1.10
NetC47_2: C47.2 P23.2 R52.2 U1.33
NetC51_2: C51.2 P21.2 R51.2 U1.11
NetCN1_1: +12V.1 SW3.1
NetCN1_2: +12V.2 SW3.4
NetLED1_1: LED1.1 R35.2
NetLED2_1: LED2.1 R36.2
NetLED3_1: LED3.1 R49.2
NetP2_3: P2.3 R19.1
NetP3_2: P3.2 U7.1
NetP5_1: P5.1 U1.5
NetP5_2: P5.2 Q3.3 R29.2
NetP6_1: P6.1 U1.8
NetP6_2: P6.2 U6.2
NetP7_1: P7.1 U1.9
NetP7_2: P7.2 U6.3
NetP11_4: P11.4 R48.2
NetP12_4: P12.4 R34.1
NetP13_1: P13.1 Q4.3
NetP13_2: P13.2 R39.2
NetP14_1: P14.1 U1.29
NetP14_2: P14.2 R40.1
NetP15_1: P15.1 Q5.3
NetP15_2: P15.2 R41.2
NetP16_1: P16.1 U1.30
NetP16_2: P16.2 R42.1
NetP17_1: P17.1 Q6.3
NetP17_2: P17.2 R43.2
NetP18_1: P18.1 U1.37
NetP18_2: P18.2 R44.1
NetP26_2: P26.2 U1.4
NetQ2_2: Q2.2 U3.2
NetQ3_2: Q3.2 R26.2
NetQ4_2: Q4.2 R40.2
NetQ5_2: Q5.2 R42.2
NetQ6_2: Q6.2 R44.2
NetR1_1: R1.1 U2.2
NetR2_1: R2.1 U2.3
NetR6_2: R6.2 R7.2 U3.4
NetR9_1: R9.1 U5.5
NetR10_1: R10.1 U5.8
NetR13_1: R13.1 U6.4
NetR16_1: R16.1 U7.14
NetR21_2: R21.2 R24.1 U7.9
NetR25_1: R25.1 U7.10
NetR26_1: R26.1 U7.2
NetR27_1: R27.1 U7.3
NetR28_1: R28.1 U7.6
NetU1_27: U1.27 U3.11
NetU1_28: U1.28 U3.12
RTS: Q1.1 Q1.5 R3.1 U2.11
S+: P1.1 R4.2
S-: P1.2 R5.2
SYNC: R8.1 U5.6
V3: C1.1 R3.2 U2.4 U2.15
VBUS: C2.1 C3.1 U2.7 U2.16 USB1.A4B9 USB1.B4A9
VCC: C14.2 U5.7
pads on no net: SW1.2 SW1.3 SW2.2 SW2.3 SW3.3 SW3.6 U1.17 U1.18 U1.19 U1.20 U1.21 U1.22 U1.32 U2.8 U2.9 U2.12 U2.13 U2.14 U3.13 USB1.A5 USB1.A8 USB1.B5 USB1.B8

## Silkscreen, mask and mechanical layers (free items; w line width, h text height)
Top Overlay:
  lines w10: 1968.5,0 1968.5,5905.51
  text "GND" at 160,1000 h60
Mechanical 1:
  the board outline again, w10

## Text inside footprints (layer, text, board x,y; h text height)
C11: Top Overlay "+" at 427.46,304.37 h25.74 r90; Top Overlay "-" at 427.21,375.68 h25.74 r90
C18: Top Overlay "+" at 1552.46,1139.37 h25.74 r90; Top Overlay "-" at 1552.21,1210.68 h25.74 r90
C28: Top Overlay "-" at 1900.68,-1237.21 h25.74; Top Overlay "+" at 1829.37,-1237.46 h25.74
C38: Top Overlay "-" at 6870.68,-1777.21 h25.74; Top Overlay "+" at 6799.37,-1777.46 h25.74
P4: Top Overlay "6" at 3320,1095 h50 r90; Top Overlay "5" at 3420,1095 h50 r90; Top Overlay "2" at 3320,735 h50 r90; Top Overlay "1" at 3420,755 h50 r90
P19: Top Overlay "6" at 1490,4595 h50 r180; Top Overlay "5" at 1490,4695 h50 r180; Top Overlay "2" at 1850,4595 h50 r180; Top Overlay "1" at 1830,4695 h50 r180
P28: Top Overlay "6" at 3065,1095 h50 r90; Top Overlay "5" at 3165,1095 h50 r90; Top Overlay "2" at 3065,735 h50 r90; Top Overlay "1" at 3165,755 h50 r90